# Altium PCB RobotShield-PCB.PcbDoc
Units mil, origin at the board's own origin, x right, y up, seen from the top; angles counter-clockwise.
Board outline 3149.61 x 2362.2 mil, 2 copper layers (Top Layer, Bottom Layer); 66 components, 41 nets, 216 pads, 35 vias.
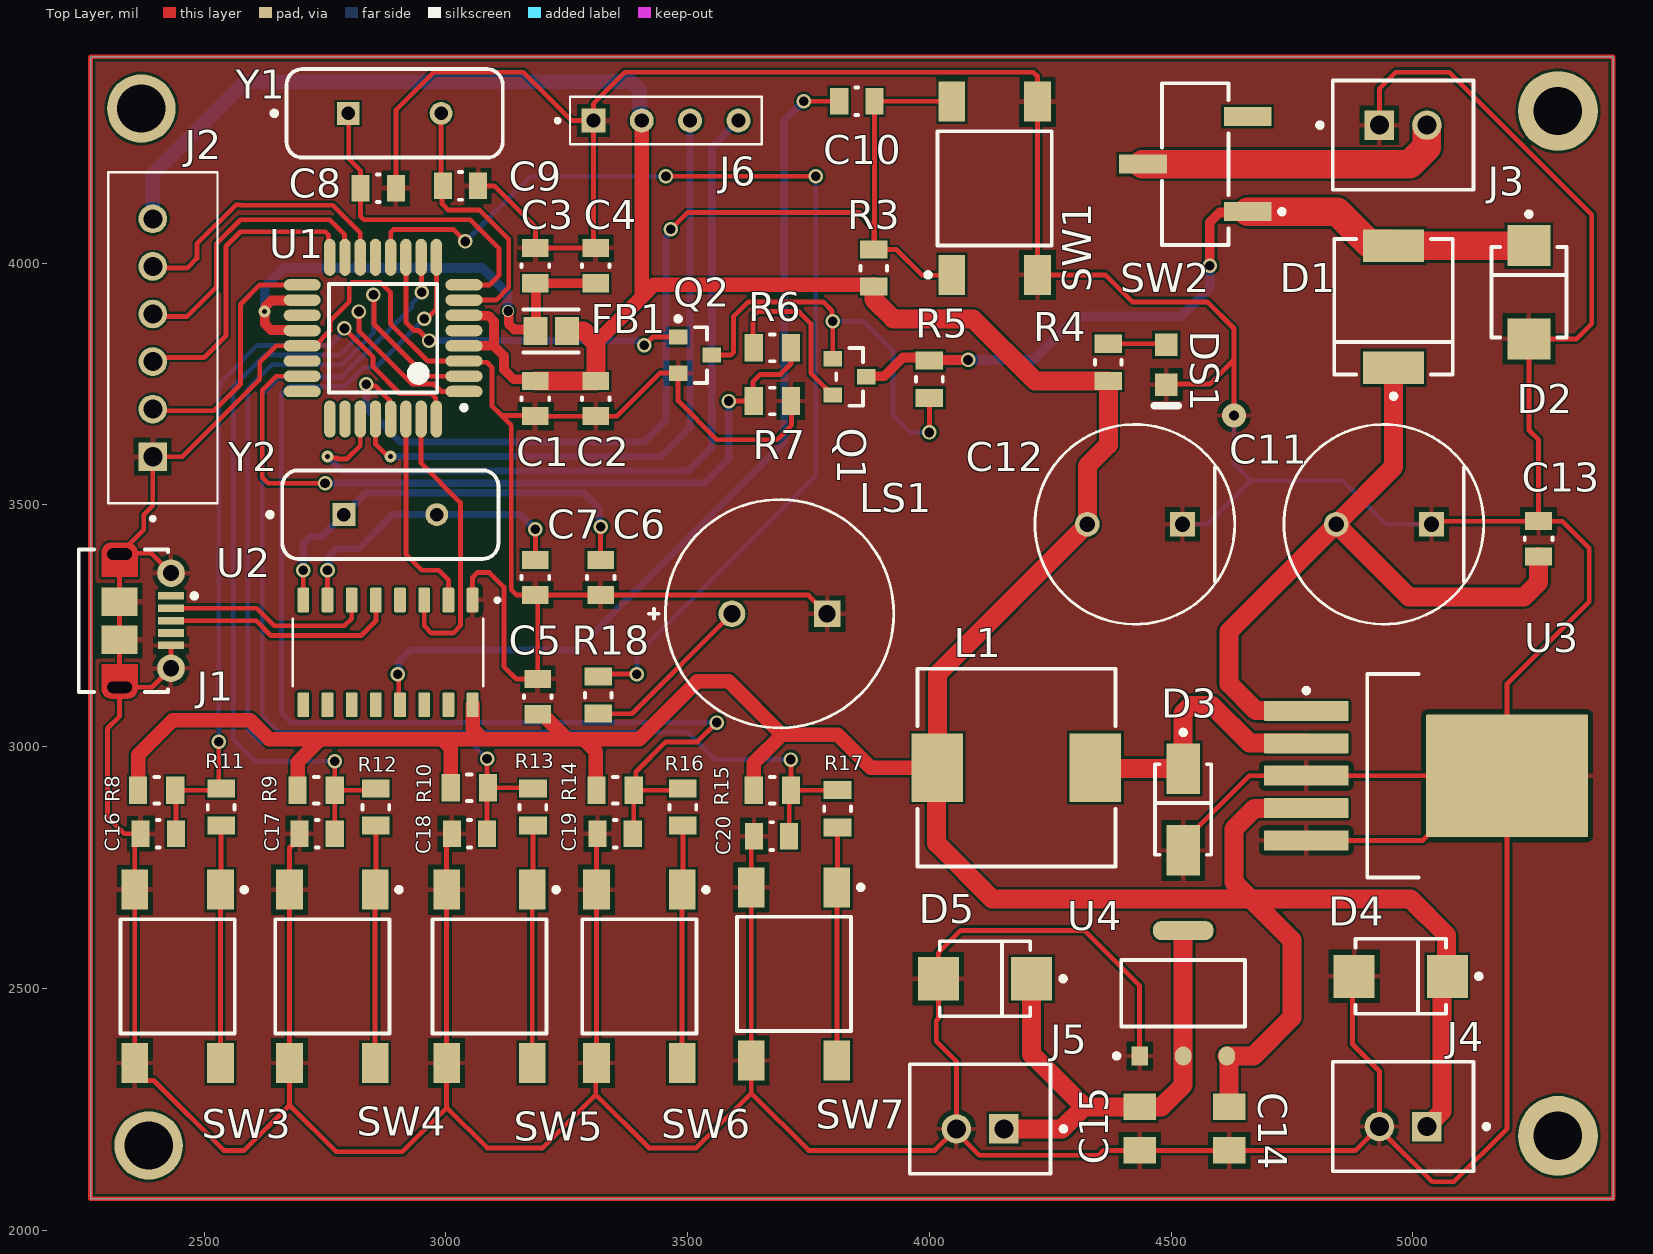
[diagram p0: Top Layer view]
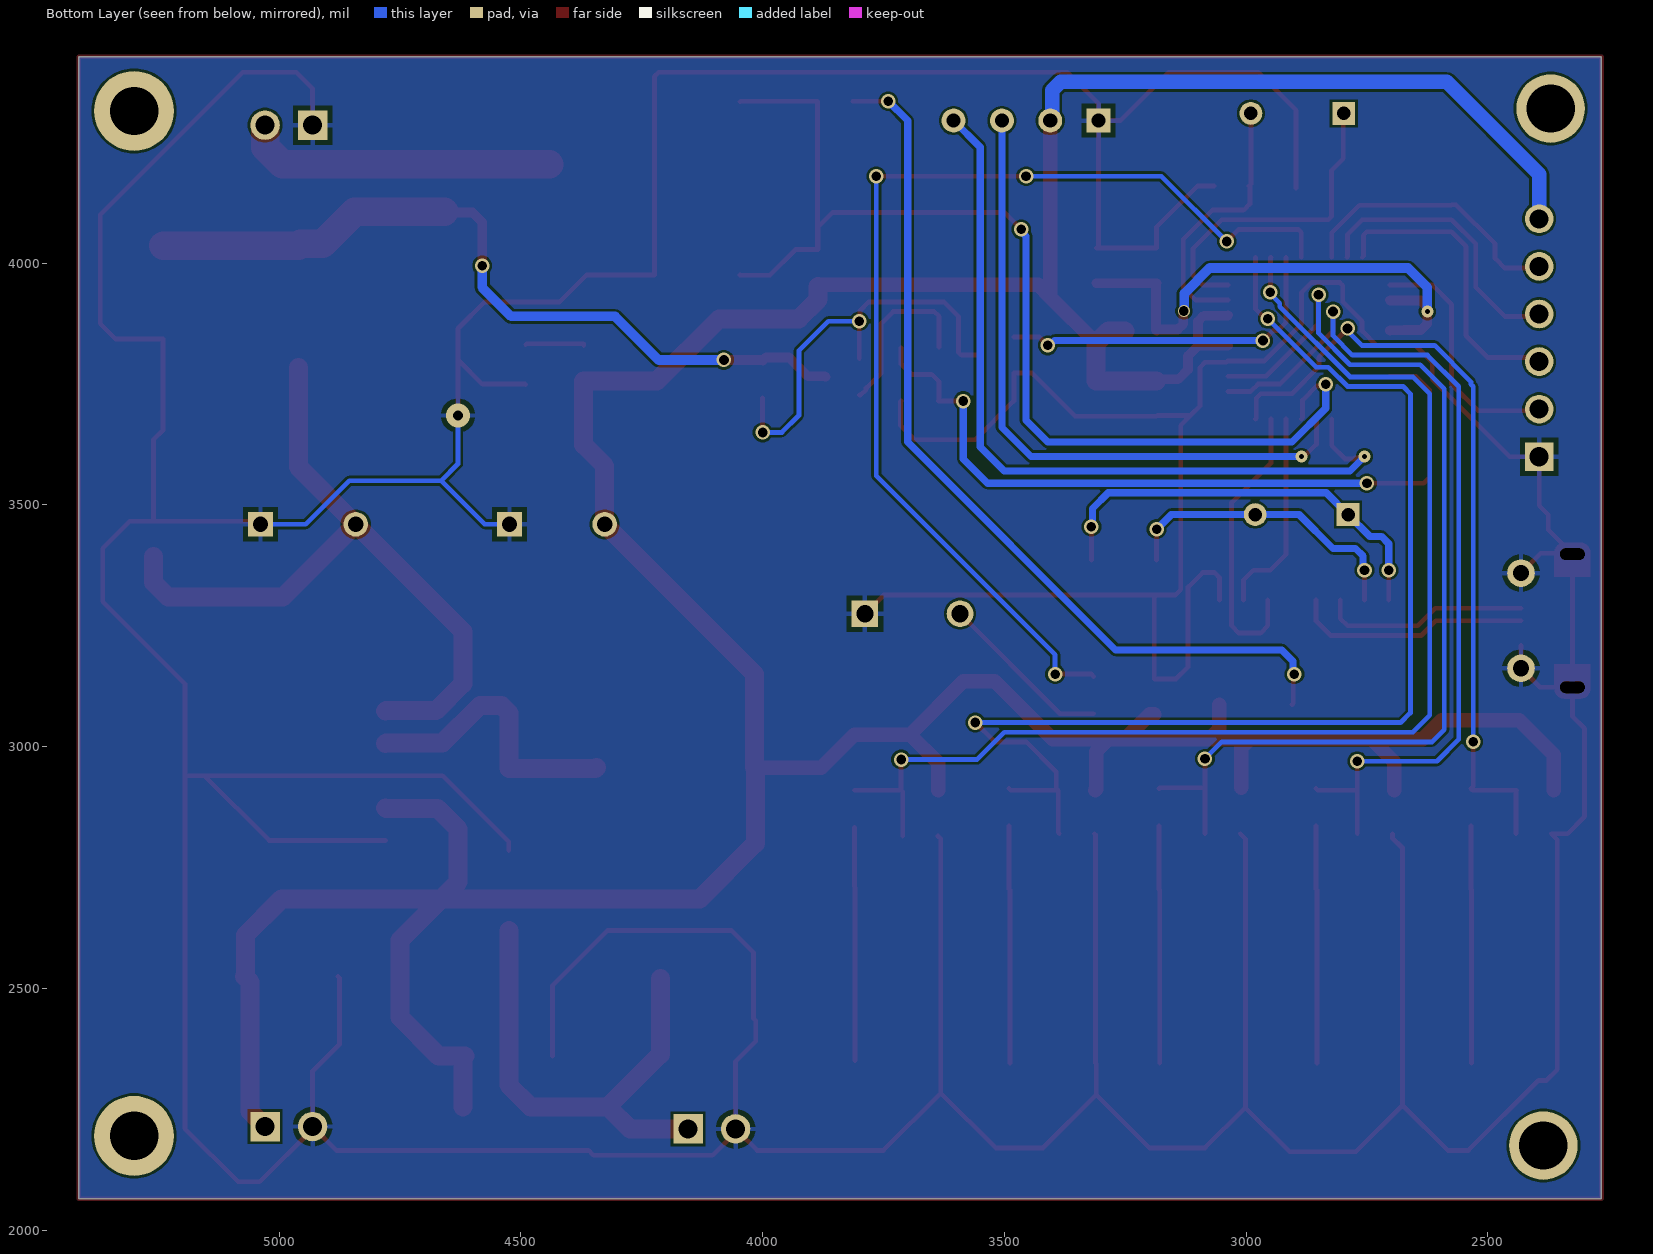
[diagram p1: Bottom Layer view, seen from below]
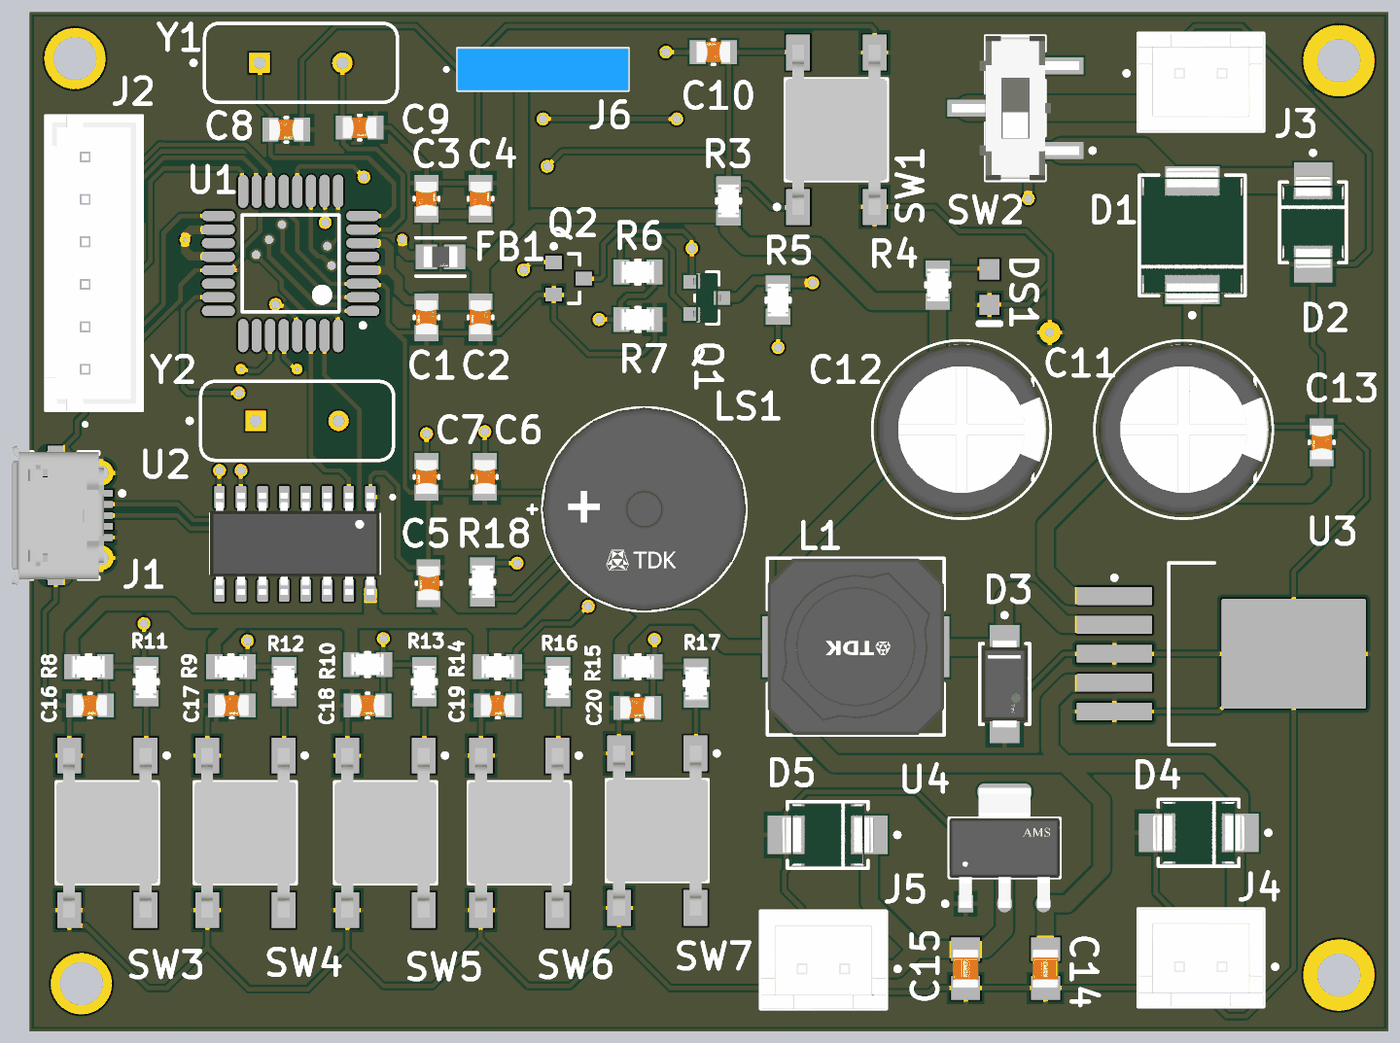
[diagram p2: 3D render of the assembled board from above, using the file's embedded part models]

## Layer stack, top to bottom
Top Solder: solder mask 0.4, Solder Resist, Dk 3.5
Top Layer: signal copper 1.4
Dielectric 1: dielectric 12.6, FR-4, Dk 4.8
Bottom Layer: signal copper 1.4
Bottom Solder: solder mask 0.4, Solder Resist, Dk 3.5

## Board outline
2265,2065 2265,4427.2 5414.61,4427.2 5414.61,2065

## Design rules (kind name [scope] priority, off if disabled: settings)
Clearance Clearance_1 [All] p1: gap=5 ignorepadtopadclearanceinfootprint=TRUE
Clearance [InNet('+5')] p2: gap=5 ignorepadtopadclearanceinfootprint=TRUE
PolygonConnect PolygonConnect_2 [All vs IsNamedPolygon('top-layer-polygon')] p1: connectstyle=Relief reliefconductorwidth=10 reliefentries=4 polygonreliefangle="90 Angle" airgapwidth=10
PolygonConnect PolygonConnect_1 [All vs IsNamedPolygon('buttom-layer-polygon')] p2: connectstyle=Relief reliefconductorwidth=10 reliefentries=4 polygonreliefangle="90 Angle" airgapwidth=10
PolygonConnect [All] p3: connectstyle=Relief reliefconductorwidth=10 reliefentries=4 polygonreliefangle="90 Angle" airgapwidth=10
RoutingVias [All] p1: holewidth=25 width=25 viastyle="Through Hole" minholewidth=10 minwidth=20 maxholewidth=30 maxwidth=50
SolderMaskExpansion [All] p1: expansion=4 istentingtop=FALSE soldermaskfromhole=TRUE
UnRoutedNet [All] p1: checkbadconnections=TRUE
Width AVCC [InNet('AVCC/AREF')] p1: maxlimit=30 minlimit=20 preferedwidth=20 minimp=50.000000 maximp=50.000000 favimp=50.000000
Width LM2596-Vout [InNet('LM2596-Vout')] p2: maxlimit=78.74 minlimit=39.37 preferedwidth=39.37 minimp=50.000000 maximp=50.000000 favimp=50.000000
Width LM2596-Vin [InNet('LM2596-Vin')] p3: maxlimit=78.74 minlimit=39.37 preferedwidth=39.37 minimp=50.000000 maximp=50.000000 favimp=50.000000
Width SW-out [InNet('SW-out')] p4: maxlimit=78.74 minlimit=10 preferedwidth=20 minimp=50.000000 maximp=50.000000 favimp=50.000000
Width 3v3 [InNet('3V3')] p5: maxlimit=78.74 minlimit=39.37 preferedwidth=39.37 minimp=50.000000 maximp=50.000000 favimp=50.000000
Width 12V [InNet('NetJ3_2')] p6: maxlimit=78.74 minlimit=59.06 preferedwidth=59.06 minimp=50.000000 maximp=50.000000 favimp=50.000000
Width 5V [InNet('+5')] p7: maxlimit=78.74 minlimit=20 preferedwidth=30 minimp=50.000000 maximp=50.000000 favimp=50.000000
Width [All] p8: maxlimit=20 minlimit=10 preferedwidth=10 minimp=50.000000 maximp=50.000000 favimp=50.000000
29 further rules are at their usual default settings.

## Classes and differential pairs
component class Power-Supply: C11 C12 C13 C14 C15 D1 D2 D3 D4 D5 DS1 J3 J4 J5 L1 Q1 Q2 R4 R5 R6 R7 SW4 U3 U4
component class peripherals: 30 C16 C17 C18 C19 C20 J6 LS1 R8 R9 R10 R11 R12 R13 R14 R15 R16 R17 R18 SW4 SW6 SW7
component class MCU&Programmer: C1 C2 C3 C4 C5 C6 C7 C8 C9 C10 FB1 J1 J2 R3 SW1 U1 U2 Y1 Y2

## Components (designator, comment, footprint, x,y, rotation, side; value= is the part's Value field where it differs from the comment)
C1 "100nf" FP-CC0805-0_85-MFG 3185,3720 r270 top value="100 nF"
C2 "100nf" FP-CC0805-0_85-MFG 3310,3720 r270 top value="100 nF"
C3 "100nf" FP-CC0805-0_85-MFG 3185,3995 r90 top value="100 nF"
C4 "100nf" FP-CC0805-0_85-MFG 3310,3995 r90 top value="100 nF"
C5 "100nf" FP-CC0805-0_85-MFG 3190,3103.58 r270 top value="100 nF"
C6 "22uf" FP-CC0805-0_85-MFG 3320,3350 r270 top value="100 nF"
C7 "22uf" FP-CC0805-0_85-MFG 3185,3350 r270 top value="100 nF"
C8 "22uf" FP-CC0805-0_85-MFG 2860,4155 r0 top value="100 nF"
C9 "22uf" FP-CC0805-0_85-MFG 3030,4160 r0 top value="100 nF"
C10 "100nf" FP-CC0805-0_85-MFG 3850,4335 r180 top value="100 nF"
C11 "470uF35V" FP-RAD-TH-D_10_0_5-L_16_1-MFG 4940,3460 r180 top
C12 "100uF35V" FP-RAD-TH-D_10_0_5-L_16_1-MFG 4425,3460 r180 top
C13 "100nf" FP-CC0805-0_85-MFG 5260,3430 r270 top value="100 nF"
C14 "100uF_0805" CAP_0805 4620,2210 r90 top
C15 "100uF_0805" CAP_0805 4435,2210 r90 top
C16 "100nf" FP-CC0805-0_85-MFG 2405,2820 r0 top value="100 nF"
C17 "100nf" FP-CC0805-0_85-MFG 2733.58,2820 r0 top value="100 nF"
C18 "100nf" FP-CC0805-0_85-MFG 3048.58,2820 r0 top value="100 nF"
C19 "100nf" FP-CC0805-0_85-MFG 3350,2820 r0 top value="100 nF"
C20 "100nf" FP-CC0805-0_85-MFG 3673.58,2815 r0 top value="100 nF"
D1 "SS34-E3/57T" FP-95402-MFG 4960,3910 r90 top
D2 "SMBJ28A" FP-SMBJ-MFG 5240,3940 r270 top
D3 "SS14" FP-403AE-MFG 4525,2870 r90 top
D4 "SMBJ28A" FP-SMBJ-MFG 4975,2525 r180 top
D5 "SMBJ28A" FP-SMBJ-MFG 4115,2520 r180 top
DS1 "LED" AVAG-HSMX-C170_V 4490,3790 r270 top
FB1 "" FP-BLM21-0_2-t0_85-e0_5-IPC_B 3217.51,3860 r0 top
J1 "micro-USB" USB-MICRO-B_V 2378.15,3260.63 r270 top
J2 "ISP-Port" JST_B6B-XH-A(LF)(SN) 2414.33,3845.79 r270 top
J3 "12V-in" FP-B2B-XH-A_LF_SN-MFG 4980,4265 r0 top
J4 "5V-out" FP-B2B-XH-A_LF_SN-MFG 4980,2235 r180 top
J5 "3V3-out" FP-B2B-XH-A_LF_SN-MFG 4105,2230 r180 top
J6 "OLED" AMPHENOL_75915-804 3455,4295 r180 top
L1 "100uH" FP-B82464G4-MFG 4180,2956.61 r180 top value=68uH
LS1 "SD1209T5-A1" FP-SD1209-MFG 3690,3275 r180 top (schematic designator LS?)
Q1 "IRLML6402TRPBF" FP-Micro3-MFG 3835,3765 r0 top
Q2 "IRLML2502TRPBF" INTR-SOT-23-3_V 3515,3810 r270 top
R3 "10K" FP-CRCW0805-e3-MFG 3885,3990 r270 top
R4 "1K" FP-CRCW0805-e3-MFG 4370,3795 r270 top
R5 "100K" FP-CRCW0805-e3-MFG 4000,3760 r90 top
R6 "22K" FP-CRCW0805-e3-MFG 3675,3825 r180 top
R7 "10K" FP-CRCW0805-e3-MFG 3675,3715 r180 top
R8 "10K" FP-CRCW0805-e3-MFG 2401.61,2910 r180 top
R9 "10K" FP-CRCW0805-e3-MFG 2731.61,2910 r180 top
R10 "10K" FP-CRCW0805-e3-MFG 3048.39,2915 r180 top
R11 "1K" FP-CRCW0805-e3-MFG 2535,2875 r270 top
R12 "1K" FP-CRCW0805-e3-MFG 2855,2875 r270 top
R13 "1K" FP-CRCW0805-e3-MFG 3180,2875 r270 top
R14 "10K" FP-CRCW0805-e3-MFG 3350,2910 r180 top
R15 "10K" FP-CRCW0805-e3-MFG 3675,2910 r180 top
R16 "1K" FP-CRCW0805-e3-MFG 3490,2875 r270 top
R17 "1K" FP-CRCW0805-e3-MFG 3810,2871.61 r270 top
R18 "1K" FP-CRCW0805-e3-MFG 3315,3106.61 r90 top
SW1 "FSM4JSMATR" TECO-FSM4JSMATR_V 4135,4155 r180 top
SW2 "JS102011SCQN" FP-JS102011SCQN-MFG 4550,4205 r90 top
SW3 "FSM4JSMATR" TECO-FSM4JSMATR_V 2445,2525 r0 top
SW4 "FSM4JSMATR" TECO-FSM4JSMATR_V 2765,2525 r0 top
SW5 "FSM4JSMATR" TECO-FSM4JSMATR_V 3090,2525 r0 top
SW6 "FSM4JSMATR" TECO-FSM4JSMATR_V 3400,2525 r0 top
SW7 "FSM4JSMATR" TECO-FSM4JSMATR_V 3720,2530 r0 top
U1 "ATmega328P-AU" 32A_M 2870,3845 r180 top
U2 "CH340G" SOIC127P600X180-16N 2880,3195 r270 top
U3 "LM2596S-5.0" KTT0005B_M 5027.68,2940 r0 top
U4 "AMS1117-3.3" FP-AMS1117-IPC_C 4525,2490 r90 top
Y1 "16MHz-XTAL" FOX-FOXSLF160-20 2893.94,4310 r0 top
Y2 "16MHz-XTAL" FOX-FOXSLF160-20 2885,3480 r0 top

## Footprints (in the part's own frame and the unit in brackets; to place one, negate y for a bottom-side part, rotate by r counter-clockwise, add the part's x,y. Pads: shape width x height; smd on the part's side, far side on the other; paste and mask are expansions set on the pad)
32A_M [mm] "Thin QFP, 32-Leads, Body 7x7mm, Pitch 0.8mm, IPC Low Density"
  oval 1.95x0.6 smd: 1(-4.25,2.8) 2(-4.25,2) 3(-4.25,1.2) 4(-4.25,0.4) 5(-4.25,-0.4) 6(-4.25,-1.2) 7(-4.25,-2) 8(-4.25,-2.8) 17(4.25,-2.8) 18(4.25,-2) 19(4.25,-1.2) 20(4.25,-0.4) 21(4.25,0.4) 22(4.25,1.2) 23(4.25,2) 24(4.25,2.8)
  oval 0.6x1.95 smd: 9(-2.8,-4.25) 10(-2,-4.25) 11(-1.2,-4.25) 12(-0.4,-4.25) 13(0.4,-4.25) 14(1.2,-4.25) 15(2,-4.25) 16(2.8,-4.25) 25(2.8,4.25) 26(2,4.25) 27(1.2,4.25) 28(0.4,4.25) 29(-0.4,4.25) 30(-1.2,4.25) 31(-2,4.25) 32(-2.8,4.25)
  silkscreen extent -4.38,-2.85 2.85,3.77, body extent -3.5,-3.5 3.5,3.5, height 1.2
AMPHENOL_75915-804 [mm]
  rect 1.258x1.258 / inner round 1.258 / far side rect 1.258x1.258 hole 0.75: 01(3.81,0)
  round 1.258 hole 0.75: 02(1.27,0) 03(-1.27,0) 04(-3.81,0)
  silkscreen extent -5.04,-1.25 5.79,1.25, body extent -5.04,-1.25 5.04,1.25, height 8.5
AVAG-HSMX-C170_V [mm] "SMD, 2-Leads, Body 2x1.25mm, Height 0.8mm"
  rect 1.2x1.2 smd: 1(-1.05,0) 2(1.05,0)
  silkscreen extent 2.15,-0.63 2.15,0.63, body extent -1,-0.63 1,0.63, height 0.8
CAP_0805 [mm]
  rect 1.4x1.7 smd: 1(-1.143,0) 2(1.143,0)
  body extent -1.15,-0.76 1.15,0.79, height 1.01
FOX-FOXSLF160-20 [mm] "THD, 2-Leads, Body 11.35x4.65mm"
  rect 1.2x1.2 hole 0.7: 1(-2.44,0)
  round 1.2 hole 0.7: 2(2.44,0)
  silkscreen extent -6.45,-2.32 5.68,2.32, body extent -5.67,-2.32 5.68,2.33, height 3.6
FP-403AE-MFG [mm]
  rect 2.65x1.75 smd paste+0 mask+0: 1(-2.15,0) 2(2.15,0)
  silkscreen extent -2.37,-1.48 4.17,1.48, body extent -3.57,-1.58 3.57,1.58, height 0.25
FP-95402-MFG [mm]
  rect 1.72x3.2 smd paste+0 mask+0: 1(-3.205,0) 2(3.205,0)
  silkscreen extent -4.82,-3.11 3.55,3.11, body extent -4.17,-3.21 4.17,3.21, height 0.25
FP-AMS1117-IPC_C [mm]
  rect 1.004x0.872 smd paste+0 mask+0: 1(-3.295,2.29)
  rrect100% 1.004x0.872 smd paste+0 mask+0: 2(-3.295,0) 3(-3.295,-2.29)
  rrect87% 1.004x3.182 smd paste+0 mask+0: 4(3.295,0)
  silkscreen extent -3.42,-3.25 1.75,3.62, body extent -3.9,-3.35 3.9,3.35, height 0.25
FP-B2B-XH-A_LF_SN-MFG [mm]
  rect 1.55x1.55 hole 1 paste-2539.97 mask+0: 1(-1.25,0.525)
  round 1.55 hole 1 paste-2539.97 mask+0: 2(1.25,0.525)
  silkscreen extent -4.5,-2.88 3.7,2.88, body extent -3.8,-2.98 3.8,2.98, height 0.25
FP-B82464G4-MFG [mm]
  rect 2.7x3.6 smd paste+0 mask+0: 1(-4.15,0) 2(4.15,0)
  silkscreen extent -5.2,-5.2 5.2,5.2, body extent -5.6,-5.3 5.6,5.3, height 0.25
FP-BLM21-0_2-t0_85-e0_5-IPC_B [mil]
  rect 49.41x57.33 smd paste+0 mask+0: 1(-32.51,0) 2(32.51,0)
  silkscreen extent -57,-44 57,44, body extent -67,-39 67,39, height 10
FP-CC0805-0_85-MFG [mm]
  rect 0.95x1.4 smd paste+0 mask+0: 1(-0.925,0) 2(0.925,0)
  silkscreen extent -0.08,-0.72 0.08,0.72, body extent -1.6,-1.05 1.6,1.05, height 0.25
FP-CRCW0805-e3-MFG [mm]
  rect 0.95x1.45 smd paste+0 mask+0: 1(-0.975,0) 2(0.975,0)
  silkscreen extent -0.13,-0.7 0.13,0.7, body extent -1.55,-0.82 1.55,0.82, height 0.25
FP-JS102011SCQN-MFG [mm]
  rect 1x2.5 smd paste+0 mask+0: 1(-2.5,-2.75) 2(0,2.75) 3(2.5,-2.75)
  silkscreen extent -4.25,-4.68 4.25,1.75, body extent -4.35,-4.1 4.35,4.1, height 0.25
FP-Micro3-MFG [mm]
  rect 0.972x0.802 smd paste+0 mask+0: 1(-0.885,0.95) 2(-0.885,-0.95) 3(0.885,0)
  silkscreen extent -0.7,-1.52 0.7,1.52, body extent -1.47,-1.87 1.47,1.87, height 0.25
FP-RAD-TH-D_10_0_5-L_16_1-MFG [mm]
  rect 1.3x1.3 hole 0.8 paste-2539.97 mask+0: 1(-2.5,0)
  round 1.3 hole 0.8 paste-2539.97 mask+0: 2(2.5,0)
  silkscreen extent -5.25,-5.25 5.25,5.25, body extent -5.35,-5.35 5.35,5.35, height 0.25
FP-SD1209-MFG [mm]
  rect 1.4x1.4 hole 0.9 paste-2539.97 mask+0: 1(-2.5,0)
  round 1.4 hole 0.9 paste-2539.97 mask+0: 2(2.5,0)
  silkscreen extent -6,-6 6.85,6, body extent -6.1,-6.1 6.1,6.1, height 0.25
FP-SMBJ-MFG [mm]
  rect 2.16x2.26 smd paste+0 mask+0: 1(-2.45,0) 2(2.45,0)
  silkscreen extent -4.22,-1.97 2.37,1.97, body extent -3.63,-2.07 3.63,2.07, height 0.25
INTR-SOT-23-3_V [mm] "SOT23, 3-Leads, Body 2.92x1.3mm, Pitch 1.9mm"
  rect 0.802x0.972 smd: 1(-0.95,-0.885) 2(0.95,-0.885) 3(0,0.885)
  silkscreen extent -2.03,-1.01 1.46,0.64, body extent -1.46,-0.65 1.46,0.65, height 1.12
JST_B6B-XH-A(LF)(SN) [mm]
  rect 1.508x1.508 / inner round 1.508 / far side rect 1.508x1.508 hole 1: 1(6.25,-0.525)
  round 1.508 hole 1: 2(3.75,-0.525) 3(1.25,-0.525) 4(-1.25,-0.525) 5(-3.75,-0.525) 6(-6.25,-0.525)
  silkscreen extent -8.7,-2.88 9.6,2.88, body extent -8.7,-2.88 8.7,2.88, height 7
KTT0005B_M [mm] "DPAK, 5-Leads, Body 10.65x9.65mm, Pitch 1.7mm, IPC Low Density"
  rrect10% 4.45x1.05 smd: 1(-6.3,3.4) 2(-6.3,1.7) 3(-6.3,0) 4(-6.3,-1.7) 5(-6.3,-3.4)
  rrect2% 8.5x6.45 smd: 6(4.25,0)
  silkscreen extent -6.42,-5.35 -0.4,5.35, body extent -3.1,-5.32 6.55,5.33, height 4.83
SOIC127P600X180-16N [mm]
  rrect25% 1.31x0.62 smd: 1(-2.75,4.445) 2(-2.75,3.175) 3(-2.75,1.905) 4(-2.75,0.635) 5(-2.75,-0.635) 6(-2.75,-1.905) 7(-2.75,-3.175) 8(-2.75,-4.445) 9(2.75,-4.445) 10(2.75,-3.175) 11(2.75,-1.905) 12(2.75,-0.635) 13(2.75,0.635) 14(2.75,1.905) 15(2.75,3.175) 16(2.75,4.445)
  silkscreen extent -2.85,-5 1.78,5.85, body extent -3,-5 3,5, height 1.8
TECO-FSM4JSMATR_V [mm] "SMD, 4-Leads, Body 6x6mm, Pitch 4.5mm"
  rect 1.4x2.1 smd: 1(2.25,4.55) 2(2.25,-4.55) 3(-2.25,4.55) 4(-2.25,-4.55)
  silkscreen extent -3,-3 3.62,4.67, body extent -3,-5 3,5, height 5.08
USB-MICRO-B_V [mm] "USB, MICRO B, Body 7.491x4.695 mm, Pitch 0.65 mm"
  rect 0.4x1.35 smd: 1(-1.3,1.35) 2(-0.65,1.35) 3(0,1.35) 4(0.65,1.35) 5(1.3,1.35)
  round 1.45 hole 0.85: 6(-2.5,1.35) 7(2.5,1.35)
  rrect50% 0x0 hole 0.6 slot 1.3 at 90 deg: 8(-3.5,-1.35) 11(3.5,-1.35)
  rect 1.5x1.9 smd: 9(-1,-1.35) 10(1,-1.35)
  Top Layer circle w0.5: c-3.6,-1.8 r0.25
  Top Layer circle w0.5: c3.6,-1.8 r0.25
  Top Layer region: -3.6,-1.8 -3.6,-0.9 -4.1,-0.9 -4.1,-1.8
  Top Layer region: 3.6,-0.9 3.6,-1.8 4.1,-1.8 4.1,-0.9
  Top Layer region: 2.3,-0.4 2.3,-2.3 3.6,-2.3 3.6,-0.4
  Top Layer region: -2.3,-2.3 -2.3,-0.4 -3.6,-0.4 -3.6,-2.3
  Top Layer lines w0.5: -3.54,-1.143 cw(c-3.6,-0.9) -3.75,-1.1 cw(c-3.6,-0.9) -3.8,-1.05 cw(c-3.6,-0.9) -3.6,-0.65 cw(c-3.6,-0.9) -3.54,-0.657 cw(c-3.6,-0.9) -3.54,-1.143 ; 3.5,-1.129 ccw(c3.6,-0.9) 3.6,-0.65 ccw(c3.6,-0.9) 3.5,-0.671 ccw(c3.6,-0.9) 3.5,-1.129
  silkscreen extent -3.75,-3.5 3.75,2.7, body extent -4.1,-3.9 4.1,1.5, height 2.67

## Part data
C1 C2 C3 C4 C5 C6 C7 C8 C9 C10 C13 C16 C17 C18 C19 C20: library part CMP-2100-03606-3, "CAP CER 0.1UF 50V X7R 0805", Capacitance="100 nF", Manufacturer=Yageo, Manufacturer Part Number=CC0805KRX7R9BB104, Package=CC0805-0.85, Temperature="-30°C to +85°C", Temperature Characteristic=X7R, Temperature Range High=+85°C, Temperature Range Low=-30°C, Tolerance=0.1, Voltage Rating="50 V", Automotive=No, Category=Cap, ComponentLink2Description=Datasheet, ComponentLink2URL=http://www.yageo.com/documents/recent/UPY-GPHC_Y5V_6.3V-to-50V_8.pdf, Device Class L1="Passive Components", Device Class L2=Capacitors, Device Class L3="Ceramic Capacitors", Digikey Description="CAP CER 0.1UF 50V X7R 0805", Footprint Url=http://www.yageo.com/exep/pages/download/literatures/UPY-C_GEN_24.pdf, Height=0.95mm, Ipc Land Pattern Name=CAPC200125X85, Lead Free=Yes, Material=Ceramic, Mouser Description="Multilayer Ceramic Capacitors MLCC - SMD/SMT 100nF 50V X7R 10%", Octopart=https://octopart.com/cc0805krx7r9bb104-yageo-192993, RoHS=TRUE
C11 C12: library part CMP-05427-001499-1, "Aluminum Electrolytic Capacitors (Radial Lead Type) AEC-Q200 Qualified 470uF ±20% 35V", Capacitance=470uF, Case/Package=Radial, Max Operating Temperature=105°C, Min Operating Temperature=-55°C, Package Quantity=500, Ripple Current=460mA, Tolerance=20%, Voltage Rating=35V, Construction=RADIAL, Contact Plating=Tin, Diameter=10mm, Height=16mm, Height - Seated (Max)=0.669inch, Lead Diameter=0.6mm, Lead Pitch=5mm, Lead/Base Style=Straight, Length=16mm, Life (Hours)=2000Hour, Mount="Through Hole", Packaging="Tape and Reel", Polarity=Polar, Radiation Hardening=No, RoHS Compliant=Yes, Series=NHG, Termination=Radial, Voltage Rating (DC)=35V
C14 C15: library part CAP_0805_10V, "Capacitor SMD 0805 10V"
D1: library part CMP-02539-000012-1, "DIODE SCHOTTKY 40V 3A DO214AB", Forward Current=3A, Manufacturer=Vishay, Max Junction Temp=+150°C, Max Repetitive Reverse Voltage=40V, Max Surge Forward Current=100A, Package=95402, Peak Reverse Current=0.5mA, Temperature="-55°C to +150°C", Temperature Range Low=-55°C, Automotive=No, Category=Diode, ComponentLink2Description=Datasheet, ComponentLink2URL=http://www.vishay.com/docs/88751/ss32.pdf, Device Class L1="Discrete Semiconductors", Device Class L2=Diodes, Device Class L3="Schottky Diodes", Digikey Description="DIODE SCHOTTKY 40V 3A DO214AB", Footprint Url=http://www.vishay.com/docs/95402/smc.pdf, Height=2.62mm, Lead Free=Yes, Manufacturer Part Number=SS34-E3/57T, Mouser Description="Schottky Diodes & Rectifiers 3.0 Amp 40 Volt", Octopart=https://octopart.com/ss34-e3%2F57t-vishay-39552907, RoHS=TRUE, Standoff Height=0mm, Temperature Range High=+150°C
D2 D4 D5: library part CMP-08607-000081-1, "TVS DIODE 28V 45.4V DO214AA", Breakdown Voltage=31.1V, Clamping Voltage=45.4V, Manufacturer="Littelfuse Inc", Max Junction Temp=+150°C, Package=SMBJ, Peak Pulse Current=13.3A, Peak Pulse Power=600W, Reverse Standoff Voltage=28V, Temperature="-65°C to +150°C", Temperature Range Low=-65°C, Automotive=No, Category=Diode, ComponentLink2Description=Datasheet, ComponentLink2URL=https://www.littelfuse.com/~/media/electronics/datasheets/tvs_diodes/littelfuse_tvs_diode_smbj_datasheet.pdf.pdf, Device Class L1="Circuit Protection", Device Class L2="TVS Diodes", Device Class L3=unset, Digikey Description="TVS DIODE 28V 45.4V DO214AA", Direction=Unidirectional, Height=2.61mm, Lead Free=Yes, Manufacturer Part Number=SMBJ28A, Mouser Description="Littelfuse SMBJ28A, Uni-Directional TVS Diode, 600W, 2-Pin DO-214AA", Number Of Channels=1, Octopart=https://octopart.com/smbj28a-littelfuse-350790, RoHS=TRUE, Temperature Range High=+150°C
D3: library part CMP-2000-04943-2, "DIODE SCHOTTKY 40V 1A SMA", Forward Current=1A, Manufacturer="ON Semiconductor", Max Junction Temp=+125°C, Max Repetitive Reverse Voltage=40V, Max Surge Forward Current=40A, Package=403AE, Peak Reverse Current=0.2mA, Temperature="-65°C to +125°C", Temperature Range Low=-65°C, Automotive=No, Category=Diode, ComponentLink2Description=Datasheet, ComponentLink2URL=https://www.onsemi.com/pub/Collateral/SS19-D.PDF, Device Class L1="Discrete Semiconductors", Device Class L2=Diodes, Device Class L3="Schottky Diodes", Digikey Description="DIODE SCHOTTKY 40V 1A SMA", Height=2.5mm, Lead Free=Yes, Manufacturer Part Number=SS14, Mouser Description="Schottky Diodes & Rectifiers SMA 40V 1.0A", Octopart=https://octopart.com/ss14-on+semiconductor-29205033, RoHS=TRUE, Standoff Height=0.05mm, Temperature Range High=+125°C
DS1: library part CMP-2000-05062-1, "Chip LED, Green, 2.2 V, -40 to 85 degC, 2-Pin SMD, Pb-Free, Tape and Reel", Forward Current If=20mA, Forward Voltage=2.2V, Forward Voltage VF Max=2.6V, LED Colour=Green, Manufacturer=Avago, Operating Temperature Max=85degC, Operating Temperature Min=-30degC, Operating Temperature Range=-30degCto+85degC, Opto Case Style=SMD, Package Description="2-Pin Surface Mount Device, Body 2 x 1.25 mm, Height 0.8 mm", Package Reference=HSMX-C170, Storage Temperature Min=-40degC, Bulb Size=1.25mmx1.4mm, Datasheet URL=https://datasheet.ciiva.com/29280/180495-da-01-en-chip-led-hsmg-c170-gelb-gruen-29280971.pdf, Datasheet Version=Oct-08, Dominant Wavelength=572nm, Dominant Wavelength Typ=572nm, External Depth=0.8mm, External Length / Height=2mm, External Width=1.25mm, Forward Current If Max=20mA, LED Mounting=SMD, LED Type=Standard, Lens Shape=Rectangular, Light Area Height=1mm, Luminous Intensity=15mcd, Luminous Intensity Min=4mcd, Luminous Intensity Typ=15mcd, Manufacturer URL=http://www.avagotech.com/, Mounting Type=SMD, MSL=MSL2A-4weeks, No. of Pins=2, Opto Mounting Orientation=Top, Packaging=CutTape, Peak Forward Current=20mA, Peak Wavelength=570nm, PIV Max=5V, Storage Temperature Max=85degC, SVHC=NoSVHC(16-Jun-2014), Viewing Angle=170deg, Voltage Vf Typ=2.2V, Wavelength Typ=570nm
FB1: library part CMP-0686-00610-3, "Chip Ferrite Bead, 0805, 220Ω @ 100MHz, 0.045Ω, 25%, 2A", Case Code (Imperial)=0805, Case Code (Metric)=2012, Current=2A, DC Resistance (DCR)=45mR, Frequency=100MHz, Max Operating Temperature=125°C, Min Operating Temperature=-55°C, Package Quantity=1, Tolerance=25%, Case/Package=0805, Contact Plating=Tin, Core Material=Ferrite, Current Rating=2A, DC Current=2A, DC Resistance-Max=45mR, Depth=1.25mm, Height=0.85mm, Impedance=220R, Lead Free="Lead Free", Length=2mm, Material=Ferrite, Max Current Rating=2A, Max DC Current=2A, Military Standard=Not, Number of Circuits=1, Number of Lines=1, Number of Pins=2, Packaging="Tape and Reel", Radiation Hardening=No, REACH SVHC="No SVHC", RoHS Compliant=Yes, Series=BLM21P, Shielding=Unshielded, Termination=SMD/SMT, Test Frequency=100MHz, Width=1.25mm
J1: library part CMP-2000-05827-1, "Micro-USB B Receptacle, Right Angle, Bottom Mount, Surface Mount, with Solder Tabs, -30 to 85 degC, 5-Pin USB, RoHS, Tape and Reel", Manufacturer=Molex, Package Description="5-Leads USB, Micro B, Body 7.5 x 5 mm, Pitch 0.65 mm", Package Reference=MICRO-B, Package Version="Rev. F, 12/2012", Standard Package=1, Voltage - Max=30V, 3D Model=105017-0001.stp, Catalog Drawings=1050170001, Category=Connectors,Interconnects, Circuits=5, Connector Type=USB-microB, Datasheet URL=http://www.molex.com/elqNow/elqRedir.htm?ref=http://www.molex.com/webdocs/datasheets/pdf/en-us/1050170001_IO_CONNECTORS.pdf, Datasheet Version=03/2016, Family=USB,DVI,HDMIConnectors, Featured Product=Micro-USBConnectorsUSBConnectors, Features=Shielded,SolderRetention, Gender=Receptacle, Ingress Protection=-, Manufacturer URL=http://www.molex.com/, Mating Products=WM17145-ND-CABLEMICROUSBBTOSTDA1.0MWM17147-ND-CABLEMICROUSBBTOSTDA2.0MWM17146-ND-CABLEMICROUSBBTOSTDA1.5M, Mounting Technology=SurfaceMount, Mounting Type=BoardCutout,SurfaceMount,RightAngle, Number of Contacts=5, Online Catalog=Molex-MicroUSB, Other Names=WM1399DKR, Package URL=http://www.molex.com/pdm_docs/sd/1050170001_sd.pdf, Packaging=Digi-Reel®, PCN Assembly/Origin=ResinSupplier21/Oct/2015, RoHS Information=1050170001CertofCompliance, Series=-, Specifications=-
J2: library part B6B-XH-A(LF)(SN), "Connector Header Through Hole 6 position 0.098 (2.50mm)", Package=None, Check_prices=https://www.snapeda.com/parts/B6B-XH-A(LF)(SN)/JST+Sales+America+Inc./view-part/?ref=eda, MF="JST Sales", MP=B6B-XH-A(LF)(SN), SnapEDA_Link=https://www.snapeda.com/parts/B6B-XH-A(LF)(SN)/JST+Sales+America+Inc./view-part/?ref=snap
J3 J4 J5: library part CMP-2000-05888-3, "CONN HEADER VERT 2POS 2.5MM", Color=Natural, Contact Resistance=20mR, Current Rating=3A, Housing Color=White, Insulation Resistance=1GR, Max Operating Temperature=85°C, Max Voltage Rating (AC)=250V, Min Operating Temperature=-25°C, Connector Type="Male Pin", Contact Material=Brass, Contact Plating=Tin, Contact Type="Male Pin", Depth=5.75mm, Fastening Type=Detent, Housing Material=Polyamide, Lead Free="Lead Free", Lead Pitch=2.5mm, Length=7.4mm, Max Current Rating=3A, Max Voltage Rating (DC)=250V, Mount="Through Hole", Number of Contacts=2, Number of Positions=2, Number of Rows=1, Orientation=Straight, Packaging=Bulk, Pitch=2.5mm, REACH SVHC="No SVHC", Series=XH, Termination=Solder, Voltage Rating=250V, Voltage Rating (AC)=250V, Wire/Cable Gauge=22AWG
J6: library part 75915-804, "DuboxÂ® 2.54mm, Board to Board Connector,Vertical Receptacle, Through Hole, Single row , 4 Positions, 2.54mm (0.100in) Pitch.", Package=None, Availability="In Stock", Check_prices=https://www.snapeda.com/parts/75915-804/Amphenol/view-part/?ref=eda, MF=Amphenol, MP=75915-804, Price=None, Purchase-URL=https://pricing.snapeda.com/search/part/75915-804/?ref=eda, SnapEDA_Link=https://www.snapeda.com/parts/75915-804/Amphenol/view-part/?ref=snap
L1: library part CMP-10464-000001-1, "FIXED IND 68UH 1.3A 130 MOHM SMD", Inductance=68uH, Manufacturer=EPCOS, Manufacturer Part Number=B82464G4683M000, Package=B82464G4, Rms Current=1.3A, Saturation Current=1.45A, Series Resistance=0.13Ω, Temperature="-55°C to +150°C", Temperature Range High=+150°C, Temperature Range Low=-55°C, Test Frequency=100kHz, Tolerance=20%, Automotive=Yes, Automotive Grade="Grade 0", Category=Ind, ComponentLink2Description=Datasheet, ComponentLink2URL=https://www.tdk-electronics.tdk.com/inf/30/db/ind_2008/b82464g4.pdf, Composition=Wirewound, Core Material=Ferrite, Device Class L1="Passive Components", Device Class L2=Inductors, Device Class L3="Fixed Inductors", Digikey Description="FIXED IND 68UH 1.3A 130 MOHM SMD", Height=4.8mm, Lead Free=Yes, Octopart=https://octopart.com/b82464g4683m000-epcos-23277316, RoHS=TRUE, Shielding=true, Standoff Height=0.21mm
LS1: library part CMP-08413-000009-1, "AUDIO MAGNETIC XDCR 3-6V TH", Current Rating=60mA, Frequency=2.048kHz, Max Operating Temperature=85°C, Min Operating Temperature=-40°C, Operating Supply Voltage=5V, Package Quantity=100, Self Resonant Frequency=2.05kHz, Diameter=12mm, Height=9mm, Lead Free="Lead Free", Max Supply Current=60mA, Mount="Through Hole", Number of Pins=2, Number of Terminals/Pins=2, Operating Supply Current=60mA, Packaging=Tray, Sensing Method=Magnetic, Series=SD, Termination="PC Pins", Voltage Rating (DC)=5V, Washable=No
Q1: library part CMP-32901-000130-1, "MOSFET P-CH 20V 3.7A SOT-23", Continuous Drain Current=-3.7A, Drain To Source Breakdown Voltage=-20V, Drain To Source Resistance=0.05Ω, Gate To Source Voltage=12V, Input Capacitace At Vds="633pF @ -10V", Manufacturer=Infineon, Max Forward Diode Voltage=-1.2V, Max Junction Temp=+150°C, Package=Micro3, Power Dissipation=1.3W, Pulse Drain Current=-22A, Temperature="-55°C to +150°C", Temperature Range Low=-55°C, Automotive=No, Category=Trans, ComponentLink2Description=Datasheet, ComponentLink2URL=https://www.infineon.com/dgdl/irlml6402pbf.pdf?fileId=5546d462533600a401535668d5c2263c, Depletion Mode=False, Device Class L1="Discrete Semiconductors", Device Class L2=Transistors, Device Class L3=MOSFETs, Digikey Description="MOSFET P-CH 20V 3.7A SOT-23", Drain To Source Voltage=-20V, Footprint Url=http://irf.com/package/outline/po_micro3.pdf, Gate Charge At Vgs="8nC @ -5V", Height=1.12mm, Ipc Land Pattern Name=SOT95P237X100-3, Lead Free=Yes, Manufacturer Part Number=IRLML6402TRPBF, Number Of Channels=1, Number Of P Channels=1, Octopart=https://octopart.com/irlml6402trpbf-infineon-65874989, Reverse Recovery Charge=11nC, Reverse Recovery Time=29ns, RoHS=TRUE, Rthja Max=75°C/W, Standoff Height=0.01mm, Technology=MOSFET, Temperature Range High=+150°C, Threshold Vgs=-0.55V, Threshold Vgs Max=-1.2V, Threshold Vgs Min=-0.4V, Turn Off Delay Time=588ns, Turn On Delay Time=350ns
Q2: library part CMP-2000-04985-1, "N-Channel HEXFET(R) Power MOSFET, 20 V VDS, +/- 12 V VGS, 4.2 A, 3-Pin SOT23, RoHS, Tape and Reel", Drain-Source On Resistance-Max=0.045O, Drain-to-Source Voltage [Vdss]=20V, Manufacturer="International Rectifier", Package Description="3-Pin Small Outline Transistor, Body 2.92 x 1.3 mm, Pitch 0.95 mm", Package Reference=SOT-23-3, Rated Power Dissipation=1.25W, Channel Type=N-Channel, Datasheet URL=https://datasheet.ciiva.com/6383/irlml2502pbf-6383216.pdf, Datasheet Version=Apr-14, Manufacturer URL=http://internationalrectifier.com/, Qg Gate Charge=8nC
R3 R4 R5 R6 R7 R8 R9 R10 R11 R12 R13 R14 R15 R16 R17 R18: library part CMP-2001-04899-2, "RES Thick Film, 100kΩ, 1%, 0.125W, 100ppm/°C, 0805", Case Code (Imperial)=0805, Case Code (Metric)=2012, Max Operating Temperature=155°C, Min Operating Temperature=-55°C, Package Quantity=5000, Power Rating=125mW, Resistance=100kR, Temperature Coefficient=100ppm/°C, Tolerance=1%, Voltage Rating=150V, Case/Package=0805, Composition="Thick Film", Contact Plating=Tin, Depth=1.25mm, Height=0.45mm, Lead Free="Lead Free", Length=2mm, Military Standard=Not, Mount="Surface Mount", Number of Pins=2, Packaging="Tape and Reel", Radiation Hardening=No, Termination=SMD/SMT, Voltage Rating (DC)=150V, Weight=0.000194oz, Width=1.25mm
SW1 SW3 SW4 SW5 SW6 SW7: library part CMP-2000-07486-1, "Micro Miniature Push Button Switch FSM JSM, 50 mA, -35 to 85 degC, 4-Pin SMD, RoHS, Tape and Reel", Capacitance=0f, Case\/Package=SMD/SMT, Contact Current Rating=50mA, Contact Resistance=100mOhm, Manufacturer="TE Connectivity", Max Operating Temperature=85degC, Max Voltage Rating (DC)=12V, Min Operating Temperature=-35degC, Operating Force=160gf, Package Description="4-Pin Surface Mount Device, Body 6 x 6 mm, Pitch 4.5 mm", Package Quantity=1200, Voltage Rating (DC)=24V, Actuator Length=0.055inch, Actuator Material=Polyamide, Contact Material=CopperAlloy, Contact Plating=Silver, Current Rating=50mA, Datasheet URL=http://www.te.com/commerce/DocumentDelivery/DDEController?Action=showdoc&DocId=Customer+Drawing%7F2-1437565-7%7FV%7Fpdf%7FEnglish%7FENG_CD_2-1437565-7_V.pdf%7F4-1437565-2, Datasheet Version="Rev. V, 02/2015", Electrical Life=100000Cycles, Illumination Type=Illuminated, Manufacturer URL=http://www.te.com/, Mechanical Life=100000Cycles, Mount=SurfaceMount, Mounting Technology=SurfaceMount, Orientation=Straight, Package Reference=FSM4JSMATR, Packaging=TapeandReel, REACH SVHC=Unknown, RoHSCompliant=true, Switch Travel=0.25mm, Termination=GullWing, Throw Configuration=SPST
SW2: library part CMP-10038-000023-1, "SWITCH SLIDE SPDT 300MA 6V", Actuator Color=Black, Case/Package=SMD/SMT, Contact Resistance=70mR, Current Rating=300mA, Max Operating Temperature=85°C, Max Voltage Rating (DC)=30V, Min Operating Temperature=-40°C, Package Quantity=4000, Voltage Rating (DC)=6V, Actuator Length=2mm, Actuator Material=Nylon, Actuator Type=Standard, Contact Material="Copper Alloy", Contact Plating=Silver, Depth=7.5mm, Electrical Life=5000Cycles, Housing Material=Nylon, Length=8.5mm, Max Current Rating=300mA, Mount="Surface Mount", Orientation=Straight, Packaging="Tape and Reel", Radiation Hardening=No, RoHS Compliant=Yes, Series=JS, Switch Function=On-On, Switch Travel=2mm, Termination="Gull Wing", Throw Configuration=SPDT
U1: library part CMP-0095-00269-2, "8-bit AVR Microcontroller, 32KB Flash, 1KB EEPROM, 2KB SRAM, 32-pin TQFP, Industrial Grade (-40°C to 85°C)", Code_JEDEC=MS-026-ABA, ComponentLink1Description="Manufacturer URL", ComponentLink1URL=http://www.atmel.com/, ComponentLink2Description="ATmega48A/48PA/88A/88PA/168A/168PA/328/328P Datasheet", ComponentLink2URL=http://www.atmel.com/dyn/resources/prod_documents/doc8271.pdf, ComponentLink3Description="ATmega48A/48PA/88A/88PA/168A/168PA/328/328P Summary", ComponentLink3URL=http://www.atmel.com/dyn/resources/prod_documents/8271S.pdf, DatasheetVersion="revD, May-2011", PackageDescription="32-Lead, 7x7x1.0 mm Body, 0.8mm Lead Pitch, Thin Profile Plastic Quad Flat Package (TQFP)", PackageReference=32A, PackageVersion="revC, Oct-2010", RevisionNote="DatasheetVersion & PackageVersion updated. URLs added."
U2: "USB Interface Integrated Circuit", Package=None, Availability="Not in stock", Check_prices=https://www.snapeda.com/parts/Ch340G/WCH/view-part/?ref=eda, MF=WCH, MP=Ch340G, Price=None, SnapEDA_Link=https://www.snapeda.com/parts/Ch340G/WCH/view-part/?ref=snap
U3: library part CMP-0069-00269-3, "SIMPLE SWITCHER® Power Converter 150 KHz 3A Step-Down Voltage Regulator, 5-pin TO-263, Pb-Free", Manufacturer="Texas Instruments", PackageTopMarking="NSUZXYTTE#*LM2596S*-5.0 P+", PowerWise=N, Code_JEDEC=MO-169-AB, ComponentLink1Description="Datasheet URL", ComponentLink1URL=http://www.ti.com/general/docs/lit/getliterature.tsp?genericPartNumber=LM2596&fileType=pdf, CompType=Switcher, PackageDescription="TO-263, Molded, .400 x .390 x .180in, 5 Lead, .067in Pitch, Surface Mount", PackageReference=KTT0005B, PinCount=5, RoHS=Y
U4: library part CMP-209535-000001-1, "LDO Voltage Regulators 1A, 3.3V", Dropout Voltage=1.1V, Manufacturer="Advanced Monolithic Systems", Max Junction Temp=+125°C, Max Power Dissipation=1.2W, Max Supply Voltage=15V, Nominal Supply Current=5mA, Output Current=1A, Output Voltage=3.3V, Package=AMS1117, Temperature="-40°C to +125°C", Temperature Range Low=-40°C, Automotive=No, Category=IC, ComponentLink2Description=Datasheet, ComponentLink2URL=http://www.advanced-monolithic.com/pdf/ds1117.pdf, Device Class L1="Integrated Circuits (ICs)", Device Class L2="Power Management ICs", Device Class L3="Voltage Regulators - Linear", Height=1.8mm, Ipc Land Pattern Name=SOT229P700X180-4, Lead Free=Yes, Manufacturer Part Number=AMS1117-3.3, Number Of Outputs=1, Octopart=https://octopart.com/ams1117-3.3-advanced+monolithic+systems-25899300, Output Type=Fixed, RoHS=TRUE, Standoff Height=0.64mm, Temperature Range High=+125°C
Y1 Y2: library part CMP-1749-00003-1, "Resistance Weld Thru-Hole Crystal, 16 MHz, -20 to 70 degC, 2-Pin THD, RoHS, Bulk", Case\Package=Axial, Max Operating Temperature="155 degC", Min Operating Temperature="-55 degC", Package Quantity=200, Power Rating="250 mW", Resistance="221 kohm", Tolerance=1%, Voltage Rating="250 V", ComponentLink1Description="Manufacturer URL", ComponentLink1URL=http://www.foxonline.com/, ComponentLink2Description=Datasheet, ComponentLink2URL=http://www.foxonline.com/pdfs/hc49slf.pdf, DatasheetVersion=Mar-15, Length="0.248 inch", Mount="Through Hole", PackageDescription="2-Pin Through Hole Device, Body 11.35 x 4.65 mm", PackageReference=FOXSLF160-20, Packaging=Bulk, RoHSCompliant=true

## Free pads (board coordinates)
  round 141.73 hole 100 paste-99999: MH1(2370,4320) MH4(2385,2175)
  round 165.35 hole 100 paste-99999: MH2(5300,4315) MH3(5300,2195)

## Via types
v1: diameter 30, hole 20, Top Layer to Bottom Layer, 29 vias
v2: diameter 25, hole 10, Top Layer to Bottom Layer, 3 vias
v3: diameter 25, hole 20, Top Layer to Bottom Layer, 1 vias
v4: diameter 50, hole 20, Top Layer to Bottom Layer, 1 vias
v5: diameter 30/30 (per signal layer), hole 20, Top Layer to Bottom Layer, 1 vias

## Nets (pads, with @x,y where several pads share a name; then routed paths per layer and width w, separated by ;. In a path a pad name is that pad's centre, name@x,y a point inside that pad or via, vN(x,y) a via of type N, cw(c..) or ccw(c..) an arc to the next point about the centre after c; other vN are vias at no path point)
3V3: C15.2 D5.1 J5.1 U4.2 U4.4 | length 1038
  Top Layer w39.37: J5.1 4274.23,2209.33 4319.9,2255 ; D5.1 4211.46,2363.44 4319.9,2255 ; U4.4 U4.2 4525,2300 4480,2255 C15.2 4319.9,2255
+5: C1.1 C2.1 C5.2 C12.2 C14.2 D4.1 FB1.2 J2.6 J4.1 J6.02 L1.2 R3.2 R4.2 R8.2 R9.2 R10.2 R14.2 R15.2 U1.4 U1.6 U2.16 U3.4 U4.3 | length 9485.6
  Top Layer w20: U1.4 3099.25,3829.25 ; U1.6 3038.02,3891.55 3087.54,3891.55 3099.25,3879.84 3099.25,3829.25 ; C1.1 3181.42,3760 3140,3760 3120,3780 3120,3808.5 3099.25,3829.25
  Top Layer w30: R8.2 2363.23,2983.23 2435,3055 2595,3055 2635,3015 2740,3015 ; R9.2 2693.23,2968.23 2740,3015 ; R10.2 3010,2997.43 2992.43,3015 ; U2.16 3055,3037.57 3072.57,3020 3067.57,3015 ; C5.2 3198.86,3067.17 3251.02,3015 ; 3310,3835 3405,3930 ; R14.2 3310,2911.61 3310,2990 3285,3015 ; J6.02 3405,3930 ; R15.2 3636.61,2966.61 3695,3025 ; R3.2 3881.61,3955 3430,3955 3405,3930 ; L1.2 3878.39,2956.61 3810,3025 3695,3025 ; 2740,3015 2992.43,3015 ; 2992.43,3015 3067.57,3015 ; 3067.57,3015 3251.02,3015 ; 3251.02,3015 3285,3015 ; 3285,3015 3400,3015 3520,3135 3585,3135 3695,3025
  Top Layer w39.37: C1.1 C2.1 3310,3835 3285,3860 FB1.2 ; R3.2 3885,3925 3925,3885 4090,3885 4218.39,3756.61 R4.2 4370,3624.43 4326.57,3581.01 C12.2 4016.61,3150.04 L1.2 4015,2955 4015,2800 4130,2685 4665,2685 ; U4.3 U4.3@4617.59,2360.28 ; U4.3@4617.67,2357.76 4620,2355.43 C14.2 ; U4.3@4617.67,2360.19 U4.3@4617.59,2360.28 ; U3.4 4778.66,2872.09 4672.09,2872.09 4630,2830 4630,2720 4665,2685 ; J4.1 5060,2245.12 5060,2513.54 D4.1 5070,2526.46 5070,2610 4995,2685 4665,2685 ; U4.3@4617.59,2360.28 4670.28,2360.28 4750,2440 4750,2600 4665,2685
  Bottom Layer w30: J2.6 2393.66,4183.66 2585,4375 3383.69,4375 3401.26,4357.43 3401.26,4298.74 J6.02
AVCC/AREF: C3.1 C4.1 FB1.1 U1.18 U1.20 | length 1138.2
  Top Layer w20: U1.20 2701.98,3861.44 2672.85,3861.44 2672.36,3861.93 2638.07,3861.93 2625,3875 v2(2625,3900) 2625.96,3900.96 2625.96,3909.79 2639.22,3923.05 2701.98,3923.05 U1.18 ; v3(3128.66,3901.25) 3129.62,3900.29 3129.62,3874.73 3141.34,3863.02 3181.98,3863.02 FB1.1 ; C3.1 C4.1 ; FB1.1@3186.36,3861.36 C3.1@3186.36,3957.22
  Bottom Layer w20: v2(2625,3900) 2625,3950 2665,3990 3075.24,3990 3127.71,3937.53 3127.71,3902.21 v3(3128.66,3901.25)
BUZ+: LS1.2 R18.1 | length 362.2
  Top Layer w10: R18.1 3384.8,3068.23 LS1.2
BUZ-pin: R18.2 U1.12 | length 2265.1
  Top Layer w10: U1.12 2885.75,4064.14 2891.61,4070 3015,4070 v1(3040,4045) ; R18.2 3320,3150 v1(3395,3150) ; v1(3455,4180) v1(3765,4180)
  Bottom Layer w10: v1(3040,4045) 3175,4180 v1(3455,4180) ; v1(3395,3150) 3395,3190 3765,3560 v1(3765,4180)
CH-XI: C7.1 U2.7 Y2.2 | length 630.8
  Top Layer w10: U2.7 v1(2755,3365) ; C7.1 v1(3185,3450)
  Bottom Layer w15: v1(2755,3365) 2757.87,3367.87 2757.87,3394.23 2773.64,3410 2820,3410 2890,3480 Y2.2 3155,3480 v1(3185,3450)
CH-XO: C6.1 U2.8 Y2.1 | length 893.3
  Top Layer w10: U2.8 v1(2705,3365) ; C6.1 v1(3320,3455)
  Bottom Layer w15: v1(2705,3365) 2705,3420 2720,3435 2743.94,3435 Y2.1 2833.94,3525 3285,3525 3317.5,3492.5 3317.5,3457.5 v1(3320,3455)
DTR: C10.2 U2.13 | length 1873.2
  Top Layer w10: v1(2900,3150) 2902.5,3147.5 2902.5,3089.23 U2.13 ; v1(3740,4335) C10.2
  Bottom Layer w15: v1(2900,3150) 2902.87,3152.87 2902.87,3176.58 2926.29,3200 3270,3200 3700,3630 3700,4295 v1(3740,4335)
GND: C1.2 C2.2 C3.2 C4.2 C5.1 C6.2 C7.2 C8.2 C9.2 C11.1 C12.1 C13.1 C14.1 C15.1 C16.1 C17.1 C18.1 C19.1 C20.1 D2.2 D3.1 D4.2 D5.2 DS1.2 J1.5 J1.6 J1.7 J1.8 J1.9 J1.10 J1.11 J2.1 J3.1 J4.2 J5.2 J6.01 LS1.1 Q2.2 R7.1 SW1.3 SW1.4 SW3.3 SW3.4 SW4.3 SW4.4 SW5.3 SW5.4 SW6.3 SW6.4 SW7.3 SW7.4 U1.3 U1.21 U2.1 U3.3 U3.5 U3.6 U4.1 | length 20462.8
  Top Layer w10: J1.8@2334.84,3408.27 2329.87,3403.29 J1.8 J1.9 J1.10 J1.11 ; J1.8@2336.81,3410.24 2375,3448.43 2375,3480 2393.66,3498.66 J2.1 2454.72,3599.72 2615,3760 2615,3795 2649.25,3829.25 U1.21 2729.25,3829.25 2760,3860 2760,3880 2800,3920 2800,3954.14 2805.86,3960 2865,3960 2885,3940 2885,3875 2962.24,3797.76 U1.3 3039.93,3795.15 3084.85,3795.15 3095,3785 3095,3705 3115,3685 ; 2352.27,3400 2390.35,3400 J1.6 ; J1.5 J1.7 2391.93,3122.83 2351.74,3122.83 2333.7,3122.83 J1.11 ; C17.1 2697.17,2811.14 2676.42,2790.39 SW4.3 SW4.4 2676.42,2258.58 ; C8.2 2896.42,4316.42 2975,4395 3160,4395 3260,4295 J6.01 ; C18.1 3001.42,2809.25 SW5.3 SW5.4 3001.42,2253.58 ; U2.1 3055,3350 3065,3360 3090,3360 3120,3330 3120,3165 3145,3140 C5.1 3190,3308.58 C7.2 ; C9.2 3100,4160 3185,4075 C3.2 C4.2 3305,4036.42 J6.01 ; C19.1 3311.42,2817.83 SW6.3 SW6.4 3310,2344.45 3310,2280 ; C20.1 3631.42,2809.25 SW7.3 SW7.4 3631.42,2283.58 ; R7.1 3715,3713.39 3715,3665 3685,3635 3560.32,3635 3480.16,3715.16 Q2.2 3442.6,3772.6 3353.58,3683.58 C2.2 C1.2 3183.58,3685 3115,3685 ; LS1.1 3749.84,3313.58 C6.2 C7.2 ; U4.1 4434.84,2505.16 4320,2620 4065,2620 4018.63,2573.63 4018.63,2520.09 D5.2 4018.54,2437.89 4014.14,2433.48 4014.14,2390.86 4055.79,2349.21 J5.2 ; DS1.2 4491.34,3750 4580,3750 4630,3800 ; D3.1 4525,2803.07 4661.93,2940 U3.3 U3.6@5154.65,2940 ; v4(4630,3685) 4630,3800 ; U3.5 5020.79,2806.14 U3.6@5154.65,2940 ; D4.2 4875,2521.46 4875,2385 4930.79,2329.21 J4.2 ; J3.1 4930.79,4360.79 4965,4395 5075,4395 5370,4100 5370,3875 5338.54,3843.54 D2.2 5240,3655 5260,3635 C13.1 ; C11.1 5044.84,3466.42 C13.1 ; J1.11 2325,3118.9 2325,3062.83 2300,3037.83 2300,2855 2335,2820 C16.1 2356.42,2807.83 SW3.3 SW3.4 2356.42,2332.09 2378.98,2309.53 2395.47,2309.53 2540,2165 2582.83,2165 2676.42,2258.58 ; 2676.42,2258.58 2772.83,2162.17 2910,2162.17 3001.42,2253.58 ; 3001.42,2253.58 3085,2170 3200,2170 3310,2280 ; 3115,3685 3135,3665 3135,3325 3146.42,3313.58 C7.2 ; J6.01 3305,4330 3370,4395 4215,4395 4223.58,4386.42 SW1.4 SW1.3 4364.13,3975.87 4420,3920 4575,3920 4630,3865 4630,3800 ; 3310,2280 3420,2170 3517.83,2170 3631.42,2283.58 ; 3631.42,2283.58 3750,2165 4011.46,2165 4052.37,2205.91 J5.2 ; J5.2 4055.79,2202.5 4103.28,2155 4350,2155 4360,2165 C15.1 C14.1 4881.46,2165 J4.2 ; J4.2 4930.79,2209.21 5040,2100 5085,2100 5195,2210 U3.6 ; U3.6@5154.65,2940 U3.6 ; U3.6 5195,3130 5365,3300 5365,3410 5308.58,3466.42 C13.1
  Bottom Layer w10: C12.1 4575,3460 4665,3550 ; v4(4630,3685) 4630,3585 4665,3550 ; C11.1 4945,3460 4855,3550 4665,3550
ISP-MISO: J2.3 U1.16 | length 632.6
  Top Layer w10: J2.3 2402.09,3805 2500,3805 2545,3850 2545,4035 2575,4065 2750,4065 2757.16,4057.84 2757.16,4014.93 U1.16
ISP-MOSI: J2.4 U1.15 | length 594.6
  Top Layer w10: J2.4 2398.66,3890 2465,3890 2525,3950 2525,4040 2575,4090 2760,4090 2790,4060 2790,4013.58 U1.15
ISP-SCK: J2.2 U1.17 | length 514.8
  Top Layer w10: J2.2 2396.81,3695 2520,3695 2575,3750 2575,3915 2615.24,3955.24 U1.17
ISP-SS: J2.5 U1.14 | length 576.8
  Top Layer w10: J2.5 2397.09,3990 2465,3990 2485,4010 2485,4040 2565.86,4120.86 2574.14,4120.86 2575,4120 2765.51,4120 2822.76,4062.76 U1.14
LM2596-Vin: C11.2 C13.2 D1.1 U3.1 | length 1524.1
  Top Layer w39.37: U3.1 4778.66,3074.84 4675.16,3074.84 4620,3130 4620,3238.43 C11.2 ; D1.1 4960,3578.43 C11.2 ; C13.2 5260,3340 5230,3310 4991.57,3310 C11.2
LM2596-Vout: D3.2 L1.1 U3.2 | length 591
  Top Layer w39.37: L1.1 4345.35,2954.65 D3.2 4525,3070 4540,3085 4585,3085 4662.09,3007.91 4778.66,3007.91 U3.2
MCU-ADC-BAT: R6.1 R7.2 U1.23 | length 1604.8
  Top Layer w10: U1.23 2648.74,3766.26 2620,3737.52 2620,3557.43 2632.43,3545 v1(2750,3545) ; v1(3585,3715) R7.2 3635,3716.61 3635,3755 3650,3770 3691.77,3770 3713.39,3791.61 R6.1
  Bottom Layer w15: v1(2750,3545) 3535,3545 3585,3595 v1(3585,3715)
MCU-ADC-EN: Q2.1 U1.11 | length 724.6
  Top Layer w10: U1.11 2917.24,3877.76 2934.21,3860.79 2943.36,3860.79 2964.16,3840 v1(2965,3840) ; v1@3410,3830 v1(3410.1,3830) 3410.2,3830 3427.6,3847.4 Q2.1
  Bottom Layer w15: v1(2965,3840) 3396.04,3840 3406.04,3830 v1(3410.1,3830)
MCU-RST: C10.1 R3.1 SW1.1 SW1.2 U1.29 | length 2363.9
  Top Layer w10: v1(2835,3750) 2838.71,3746.29 2853.71,3746.29 2883.14,3716.86 2883.14,3680.28 U1.29 ; v1(3465,4070) 3500,4105 3855,4105 3885,4075 R3.1 ; SW1.1 4045.55,3975 3985,3975 3931.61,4028.39 R3.1 ; SW1.2 4045.55,4335 C10.1 3886.42,4029.8 R3.1
  Bottom Layer w15: v1(2835,3750) 2835,3700 2905,3630 3410,3630 3455,3675 3455,4055.94 3465,4065.94 v1(3465,4070)
MCU-RX: U1.30 U2.2 | length 431.3
  Top Layer w10: U1.30 2917.24,3397.76 2950,3365 2985,3365 3005,3345 U2.2
MCU-SCK: J6.03 U1.28 | length 1373.2
  Top Layer w10: U1.28 2854.63,3677.3 2854.63,3625.37 2877.13,3602.87 2882.13,3602.87 v2(2885,3600)
  Bottom Layer w15: v2(2885,3600) 3445,3600 3505,3660 J6.03
MCU-SDA: J6.04 U1.27 | length 1662.2
  Top Layer w10: v2(2755,3600) 2757.87,3597.13 2775.37,3597.13 2777.5,3595 2795,3595 2822.76,3622.76 U1.27
  Bottom Layer w15: v2(2755,3600) 2785,3570 3500,3570 3550,3620 3550,4240 J6.04
MCU-TX: U1.31 U2.3 | length 602
  Top Layer w10: U1.31 2948.74,3586.26 3030,3505 3030,3250 3015,3235 2970,3235 2955,3250 U2.3
MCU-XTAL1: C9.1 U1.7 Y1.2 | length 560.2
  Top Layer w10: Y1.2 2990,4163.58 C9.1 ; C9.1@2992.17,4160 2992.17,4122.83 3005,4110 3070,4110 3130,4050 3130,3950 3103.74,3923.74 U1.7
MCU-XTAL2: C8.1 U1.8 Y1.1 | length 673.6
  Top Layer w10: Y1.1@2798.94,4310 2798.94,4216.06 2823.58,4191.42 C8.1 2823.58,4096.42 2830,4090 3050,4090 3110,4030 3110,3975 3090.24,3955.24 U1.8
NetDS1_1: DS1.1 R4.1 | length 124.2
  Top Layer w10: R4.1@4370,3830 R4.1 4487.95,3833.39 DS1.1
NetJ3_2: J3.2 SW2.2 | length 647.3
  Top Layer w59.06: SW2.2 4993.63,4205 5028.84,4240.2 5028.84,4285.29 J3.2
NetQ1_1: Q1.1 Q2.3 R5.1 | length 890.6
  Top Layer w10: Q2.3 3589.14,3810 3595,3815.86 3595,3890 3625,3920 3780,3920 3798.79,3901.21 3798.79,3881.21 v1(3800,3880) 3800,3802.56 Q1.1 ; v1(4000,3650) R5.1
  Bottom Layer w10: v1(3800,3880) 3864.14,3880 3925,3819.14 3925,3685 3960,3650 v1(4000,3650)
NetQ1_2: Q1.2 R6.2 | length 366
  Top Layer w10: R6.2@3635,3826.61 3635,3890 3645,3900 3730,3900 3755,3875 3755,3772.76 3786.02,3741.73 3786.02,3738.39 3796.81,3727.6 Q1.2
NetR11_2: R11.2 SW3.1 SW3.2 | length 491.3
  Top Layer w10: SW3.2 SW3.1 2535,2705.55 R11.2
NetR12_2: R12.2 SW4.1 SW4.2 | length 491.3
  Top Layer w10: SW4.2 SW4.1 2855,2705.55 R12.2
NetR13_2: R13.2 SW5.1 SW5.2 | length 491.3
  Top Layer w10: SW5.2 SW5.1 3180,2705.55 R13.2
NetR16_2: R16.2 SW6.1 SW6.2 | length 491.3
  Top Layer w10: SW6.2 SW6.1 3490,2705.55 R16.2
NetR17_2: R17.2 SW7.1 SW7.2 | length 482.9
  Top Layer w10: SW7.2 SW7.1 3810,2710.55 R17.2
SW1: C16.2 R8.1 R11.1 U1.32 | length 1640.7
  Top Layer w10: C16.2 2441.42,2908.58 R8.1 2531.61,2910 R11.1 2530,2918.39 v1(2530,3010) ; v1(2790,3865) 2849.41,3805.59 2849.41,3785.59 2905,3730 2970,3730 2979.03,3720.97 2979.03,3678.88 U1.32
  Bottom Layer w10: v1(2530,3010) 2530,3745 2535,3750 2535,3755 2610,3830 2760.41,3830 2790,3859.59 v1(2790,3865)
SW2: C17.2 R9.1 R12.1 U1.1 | length 1857.7
  Top Layer w10: C17.2 R9.1 ; v1(2770,2970) R9.1 ; v1(2820,3900) 2820,3860 2930,3750 2975,3750 2990.24,3734.76 U1.1 ; R12.1 2851.61,2910 R9.1
  Bottom Layer w10: v1(2770,2970) 2605,2970 2560,3015 2560,3745 2625,3810 2780,3810 2820,3850 v1(2820,3900)
SW3: C18.2 R10.1 R13.1 U1.2 | length 2155.2
  Top Layer w10: v1(2850,3935) 2851.21,3933.79 2851.21,3873.79 2958.74,3766.26 U1.2 ; C18.2 3085,2913.23 R10.1 ; v1(3085,2975) 3085,2916.77 R10.1 ; R13.1 3178.39,2915 R10.1
  Bottom Layer w10: v1(2850,3935) 2850,3855 2785,3790 2640,3790 2590,3740 2590,3035 2615,3010 3050,3010 v1(3085,2975)
SW4: C19.2 R14.1 R16.1 U1.9 | length 2511.4
  Top Layer w10: v5(2955,3885) 2960.41,3885 2980.24,3904.82 U1.9 ; C19.2 3388.39,2821.97 R14.1 ; R16.1 3486.61,2910 R14.1 ; v1(3560,3050) 3520,3010 3455,3010 3392.69,2947.69 3392.69,2914.3 R14.1
  Bottom Layer w10: v5(2955,3885) 2855,3785 2830,3785 2790,3745 2675,3745 2660,3730 2660,3070 2680,3050 v1(3560,3050)
SW5: C20.2 R15.1 R17.1 U1.10 | length 2548.4
  Top Layer w10: U1.10 2949.37,4011.69 2949.37,3940.63 v1(2950,3940) ; C20.2 3710,2906.61 R15.1 ; v1(3713.39,2973.39) R15.1 ; R17.1 R15.1
  Bottom Layer w10: v1(2950,3940) 2950,3937.07 2930.25,3917.32 2930.25,3910.25 2785,3765 2655,3765 2620,3730 2620,3065 2655,3030 3500,3030 3556.61,2973.39 v1(3713.39,2973.39)
SW-out: D1.2 D2.1 Q1.3 R5.2 SW2.1 | length 1620.5
  Top Layer w20: Q1.3 3870.94,3766.1 3906.1,3766.1 3945,3805 3993.39,3805 R5.2 4001.61,3800 v1(4080,3800) ; v1@4580,4000 4580,4085 4600,4105 4656.69,4105 SW2.1
  Top Layer w59.06: SW2.1 4843.43,4106.57 4909.49,4040.51 4955.67,4040.51 D1.2 4960.14,4036.32 5239.86,4036.32 D2.1
  Bottom Layer w20: v1(4080,3800) 4215,3800 4305,3890 4520,3890 4580,3950 v1(4580,3995)
"USB D+": J1.3 U2.5 | length 492.1
  Top Layer w10: J1.3 2607.25,3260.63 2637.88,3230 2825,3230 2855,3260 U2.5
"USB D-": J1.2 U2.6 | length 433.2
  Top Layer w10: J1.2 2608.78,3286.22 2645,3250 2790,3250 2805,3265 U2.6
pads on no net: J1.1 J1.4 SW2.3 U1.5 U1.13 U1.19 U1.22 U1.24 U1.25 U1.26 U2.4 U2.9 U2.10 U2.11 U2.12 U2.14 U2.15
copper on no net: | length 11023.6
  Top Layer w10: 2265,2065 5414.61,2065 5414.61,4427.2 2265,4427.2 2265,2065

## Polygon pours and split planes (outlines as drawn)
GND on Top Layer "GND_L01_P000" (solid, remove dead copper, pour order 0): 2265,2065 2265,4427.2 5414.61,4427.2 5414.61,2065
GND on Bottom Layer "GND_L02_P001" (solid, remove dead copper, pour order 1): 2265,2065 2265,4427.2 5414.61,4427.2 5414.61,2065

## Text inside footprints (layer, text, board x,y; h text height)
J1: Mechanical 1 "PCB EDGE" at 2263.98,3544.09 h11.81 r270